# EAGLE board 001 (EAGLE 8.7.1)
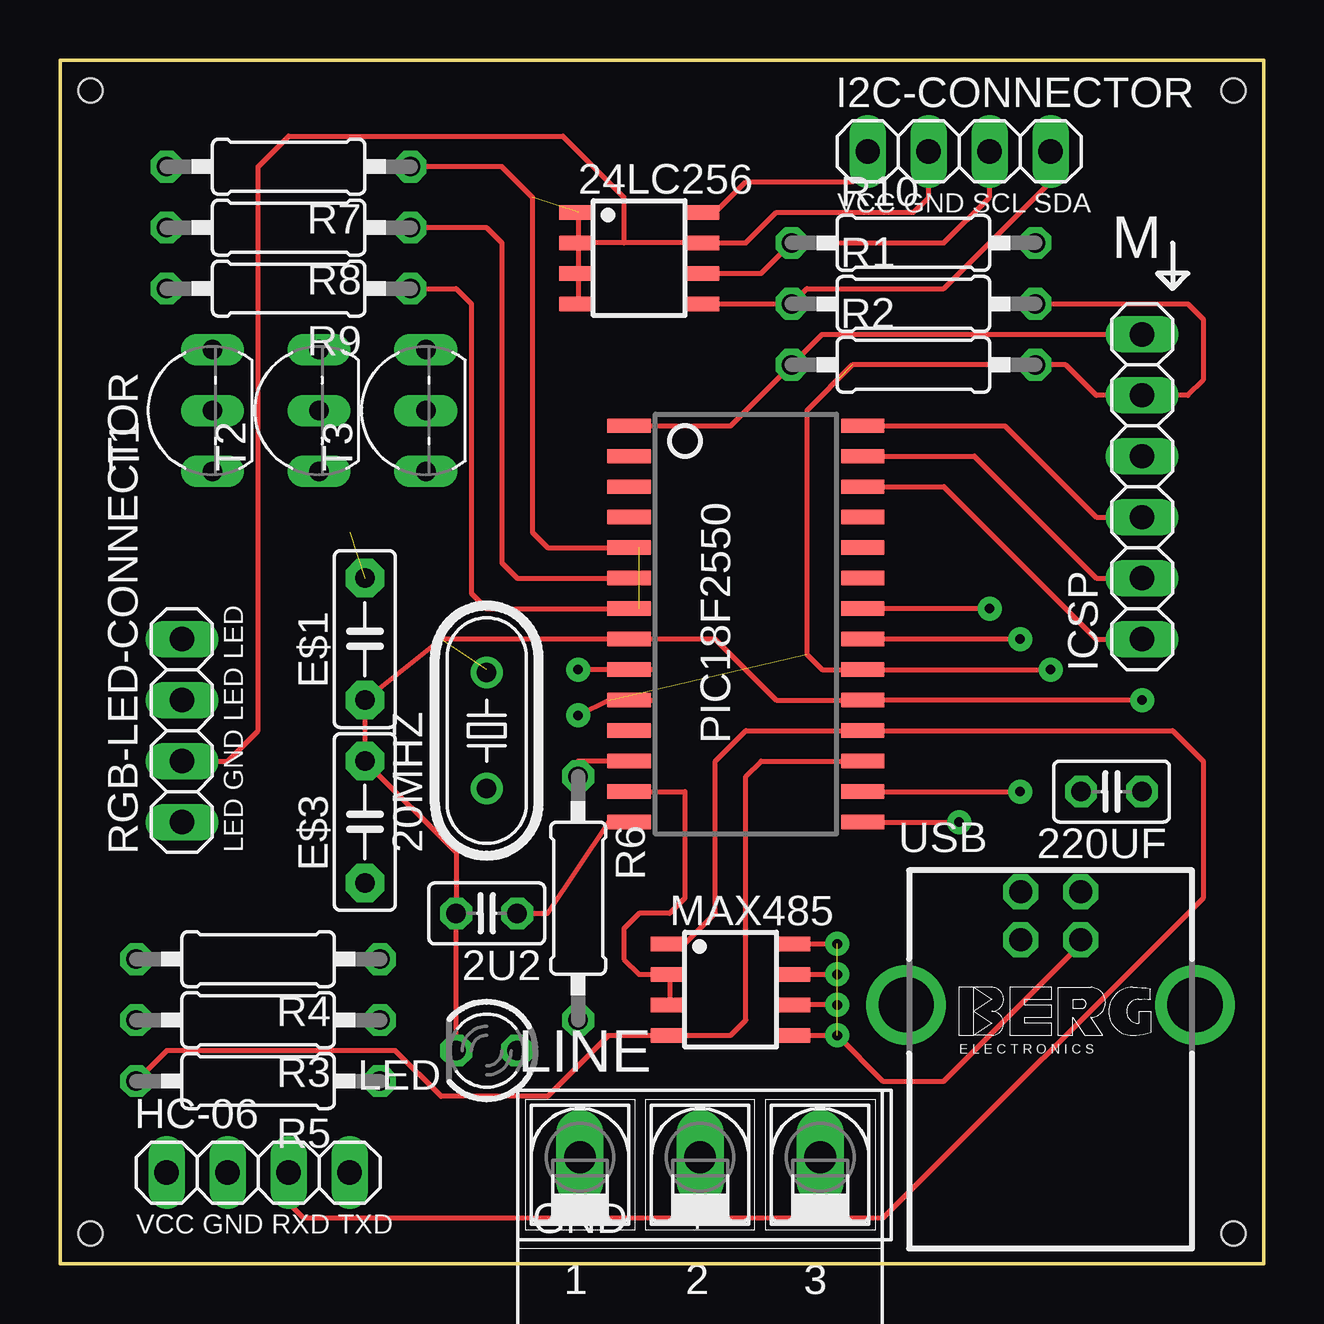
[diagram p0: board, top side]
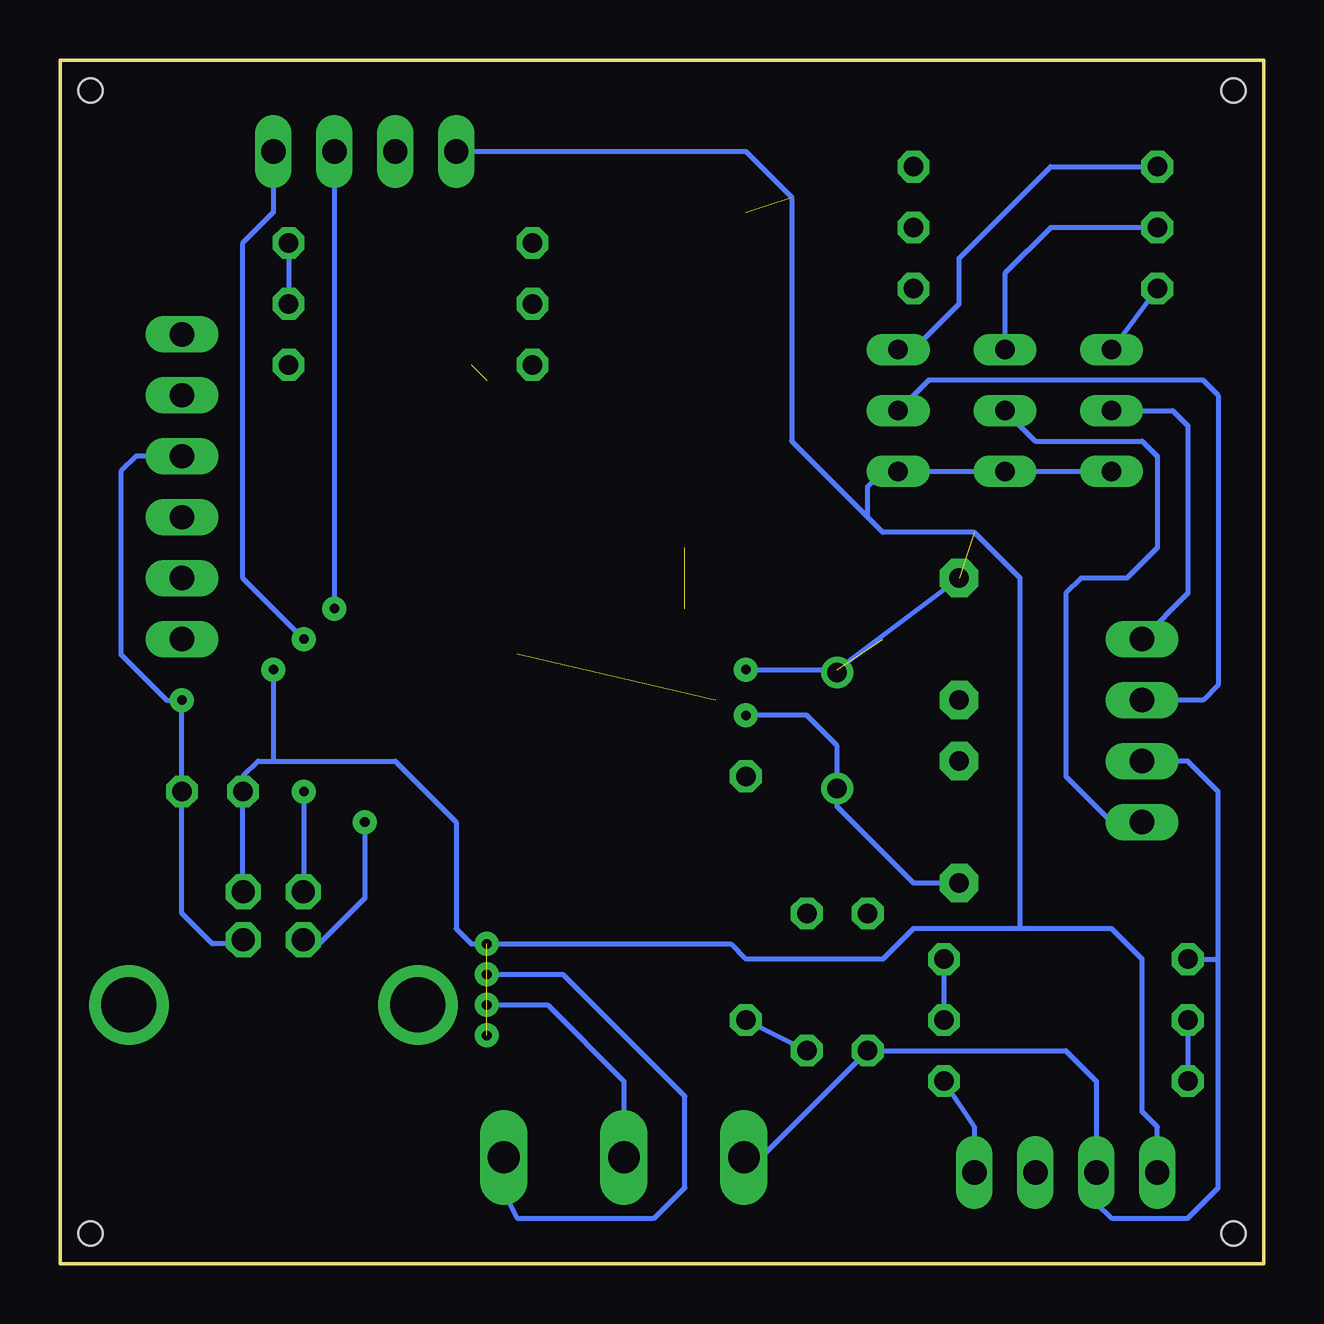
[diagram p1: board, bottom side, seen from below]

Size 50.16 x 50.16 mm. Coordinates in mm from the lower left corner, seen from the top.
Outline: 0,0 50.16,0 50.16,50.16 0,50.16 0,0
Copper layers (1*16): Top 0.035mm / dielectric 1.5mm / Bottom 0.035mm
Design rules "default": minimum track width 6mil, minimum drill 0.35mm, track to track 6mil, track to pad 6mil, pad to pad 6mil, via to via 6mil, smd to smd 6mil, copper to edge 40mil, drill to drill 6mil, minimum pad ring 10mil, minimum via ring 8mil, stop-mask expansion 4mil, vias tented up to drill 0mil, thermal gap 10mil
Holes 1 mm at 1.27,1.27 48.9,1.27 48.9,48.9 1.27,48.9

## Footprints (pad centres in the part's own frame; a part is rotated, then mirrored left to right if it is on the bottom)
C025-025X050 = drill 0.813 octagon: 1 -1.27,0; 2 1.27,0
HC49/S = drill 0.813: 1 -2.413,0; 2 2.413,0
M8 = smd 0.6 x 1.4: 1 -1.905,-2.63; 2 -0.635,-2.63; 3 0.635,-2.63; 4 1.905,-2.63; 5 1.905,2.63; 6 0.635,2.63; 7 -0.635,2.63; 8 -1.905,2.63
C5B2.5 = drill 0.813 pad 1.6 octagon: 1 -2.54,0; 2 2.54,0
1X04 = drill 1.016 long: 1 -3.81,0; 2 -1.27,0; 3 1.27,0; 4 3.81,0
1X06 = drill 1.016 long: 1 -6.35,0; 2 -3.81,0; 3 -1.27,0; 4 1.27,0; 5 3.81,0; 6 6.35,0
LED3MM = drill 0.813 octagon: A -1.27,0; K 1.27,0
AK500/3-H = drill 1.321 long: 1 -5.004,0; 2 0,0; 3 5.004,0
SOIC28-3 = smd 0.6 x 1.8: 1 -8.255,-4.87; 2 -6.985,-4.87; 3 -5.715,-4.87; 4 -4.445,-4.87; 5 -3.175,-4.87; 6 -1.905,-4.87; 7 -0.635,-4.87; 8 0.635,-4.87; 9 1.905,-4.87; 10 3.175,-4.87; 11 4.445,-4.87; 12 5.715,-4.87; 13 6.985,-4.87; 14 8.255,-4.87; 15 8.255,4.87; 16 6.985,4.87; 17 5.715,4.87; 18 4.445,4.87; 19 3.175,4.87; 20 1.905,4.87; 21 0.635,4.87; 22 -0.635,4.87; 23 -1.905,4.87; 24 -3.175,4.87; 25 -4.445,4.87; 26 -5.715,4.87; 27 -6.985,4.87; 28 -8.255,4.87
0207/10 = drill 0.813 octagon: 1 -5.08,0; 2 5.08,0
TO92-BCE = drill 0.813 long: B 2.54,0; C 0,0; E -2.54,0
PN61729-S = drill 0.95 octagon: 1 1.25,4.71; 2 -1.25,4.71; 3 -1.25,2.71; 4 1.25,2.71 | drill 2.3 pad 2.9: S1 -6.02,0; S2 6.02,0

## Placement (x,y rotation side)
2U2  [C025-025X050]  17.78,14.61 180 top
20MHZ  [HC49/S]  17.78,22.23 90 top
24LC256  [M8]  24.13,41.91 270 top
220UF  [C025-025X050]  43.81,19.68 180 top
E$1  [C5B2.5]  12.7,26.04 90 top
E$3  [C5B2.5]  12.7,18.41 90 top
HC-06  [1X04]  8.26,3.81 0 top
I2C-CONNECTOR  [1X04]  37.47,46.35 0 top
ICSP  [1X06]  45.09,32.38 90 top
LED  [LED3MM]  17.78,8.89 180 top
LINE  [AK500/3-H]  26.67,4.45 0 top  (not fitted)
MAX485  [M8]  27.94,11.43 270 top
PIC18F2550  [SOIC28-3]  28.57,26.67 270 top
R1  10k  [0207/10]  35.56,40.01 0 top
R2  10k  [0207/10]  35.56,37.47 0 top
R3  1k  [0207/10]  8.26,10.16 180 top
R4  1k  [0207/10]  8.26,12.7 180 top
R5  1k  [0207/10]  8.26,7.62 180 top
R6  470  [0207/10]  21.59,15.24 270 top
R7  470  [0207/10]  9.53,45.72 180 top
R8  470  [0207/10]  9.53,43.18 180 top
R9  470  [0207/10]  9.53,40.64 180 top
R10  10k  [0207/10]  35.56,42.55 0 top
RGB-LED-CONNECTOR  [1X04]  5.08,22.23 90 top
T1  BC640  [TO92-BCE]  6.35,35.56 90 top
T2  BC640  [TO92-BCE]  10.79,35.56 90 top
T3  BC640  [TO92-BCE]  15.24,35.56 90 top
USB  [PN61729-S]  41.27,10.79 0 top

## Library data of the parts
2U2 220UF = rcl
20MHZ = crystal
24LC256 MAX485 = memory
E$1 E$3 = capacitor-wima
HC-06 I2C-CONNECTOR ICSP RGB-LED-CONNECTOR = pinhead
LED = led
LINE = con-ptr500
PIC18F2550 = cypress
R1-R10 = eagle-ltspice
T1-T3 = transistor-pnp
USB = con-berg

## Nets
S$1: R3.2 R5.2
S$2: 2U2.2 HC-06.1 HC-06.2 I2C-CONNECTOR.1 LED.K R4.2 R7.1 R8.1 R9.1 RGB-LED-CONNECTOR.2
S$3: RGB-LED-CONNECTOR.4
S$5: I2C-CONNECTOR.4 R1.1
S$8: 2U2.1
S$11: HC-06.3
S$12: R7.2 T3.B
S$14: R6.1
S$15: R6.2
S$16: R1.2 R10.2
S$18: ICSP.2
S$20: I2C-CONNECTOR.3
S$23: R8.2 T2.B
S$24: I2C-CONNECTOR.2
S$25: HC-06.4 R5.1
S$27: R9.2 T1.B
S$28: T3.C
S$29: RGB-LED-CONNECTOR.1 T2.C
S$32: R3.1 R4.1

## Tracks (layer width: path | path; a pad name or v marks a point on that pad's centre or on a via)
S$1
  Top 0.2: 33.66,20.95 29.21,20.95 28.57,20.32 28.57,10.16 27.94,9.53 22.86,9.53 20.32,6.99 15.88,6.99 13.97,8.89 4.45,8.89 R5.2
  Bottom 0.2: R3.2 R5.2
S$2  (via drill 0.4 pad 1)  (8 unrouted)
  Top 0.2: R9.1 16.51,40.64 17.14,40.01 17.14,27.94 17.78,27.3 24.13,27.3 | 26.04,43.81 27.3,43.81 28.57,45.09 33.02,45.09 33.66,45.72 I2C-CONNECTOR.1 | 33.66,23.5 29.84,23.5 27.3,26.04 15.88,26.04 12.7,23.5 12.7,20.95 16.51,17.14 2U2.2 LED.K | 24.77,24.77 v21.59,24.77 | 24.13,28.57 19.05,28.57 18.41,29.21 18.41,42.55 17.78,43.18 R8.1 | 24.13,29.84 20.32,29.84 19.68,30.48 19.68,44.45 18.41,45.72 R7.1 | RGB-LED-CONNECTOR.2 6.99,20.95 8.26,22.23 8.26,45.72 9.53,46.99 20.95,46.99 23.5,44.45 23.5,42.55 | 21.59,43.81 21.59,42.55 | 21.59,42.55 21.59,40.01 | 26.67,42.55 23.5,42.55 | 23.5,42.55 21.59,42.55 | 39.37,10.16 36.83,7.62 34.29,7.62 v32.38,9.53 30.48,9.53 | v32.38,10.79 30.48,10.79 | 30.48,12.06 v32.38,12.06
  Bottom 0.2: I2C-CONNECTOR.1 21.59,46.35 19.68,44.45 19.68,34.29 16.51,31.11 | HC-06.1 4.45,5.71 5.08,6.35 5.08,12.7 6.35,13.97 10.16,13.97 | v21.59,24.77 17.78,24.77 12.7,28.57 | 21.59,4.45 20.95,4.45 LED.K 8.26,8.89 6.99,7.62 HC-06.2 6.99,2.54 6.35,1.91 3.17,1.91 1.91,3.17 1.91,12.7 | 1.91,12.7 1.91,19.68 3.17,20.95 RGB-LED-CONNECTOR.2 | 10.16,13.97 10.16,28.57 12.06,30.48 15.88,30.48 16.51,31.11 | 16.51,31.11 16.51,32.38 15.88,33.02 5.71,33.02 | R4.2 1.91,12.7 | 10.16,13.97 14.61,13.97 15.88,12.7 21.59,12.7 22.23,13.34 v32.38,13.34 | 26.67,4.45 26.67,7.62 29.84,10.79 v32.38,10.79 | 31.75,4.45 31.75,3.17 31.11,1.91 25.4,1.91 24.13,3.17 24.13,6.99 29.21,12.06 v32.38,12.06
S$3
  Bottom 0.2: 6.35,35.56 3.81,35.56 3.17,34.92 3.17,27.94 RGB-LED-CONNECTOR.4
S$5  (via drill 0.4 pad 1)
  Top 0.2: 27.3,40.01 R1.1 31.11,40.64 36.83,40.64 41.27,45.09 I2C-CONNECTOR.4 | v40.01,26.04 33.66,26.04
  Bottom 0.2: v40.01,26.04 42.55,28.57 42.55,42.55 41.27,43.81 I2C-CONNECTOR.4
S$6  (via drill 0.4 pad 1)
  Top 0.2: 33.66,19.68 v40.01,19.68
  Bottom 0.2: v40.01,19.68 40.01,15.24
S$7  (via drill 0.4 pad 1)
  Top 0.2: 33.66,18.41 v37.47,18.41
  Bottom 0.2: v37.47,18.41 37.47,15.24 39.37,13.34 40.01,13.34
S$8
  Top 0.2: 2U2.1 20.32,14.61 22.86,18.41 24.13,18.41
S$9
  Top 0.2: 38.73,9.53 42.55,13.34
S$10
  Top 0.2: 30.48,13.34 32.38,13.34
S$11
  Top 0.2: HC-06.3 9.53,2.54 10.16,1.91 34.29,1.91 47.62,15.24 47.62,20.95 46.35,22.23 28.57,22.23 27.3,20.95 27.3,14.61 26.04,13.34 25.4,13.34
S$12
  Bottom 0.2: T3.B 14.61,38.1 12.7,40.01 12.7,41.91 8.89,45.72 R7.2
S$13
  Top 0.2: 23.5,19.68 26.04,19.68 26.04,15.24 25.4,14.61 24.13,14.61 23.5,13.97 23.5,12.7 24.13,12.06 25.4,12.06 25.4,10.79 24.77,10.79
S$14
  Top 0.2: R6.1 21.59,20.95 23.5,20.95
S$15
  Bottom 0.2: R6.2 19.05,8.89
S$16  (via drill 0.4 pad 1)  (2 unrouted)
  Top 0.2: R1.2 46.99,40.01 47.62,39.37 47.62,36.83 46.99,36.2 43.18,36.2 41.91,37.47 33.02,37.47 31.11,35.56 31.11,25.4 31.75,24.77 v41.27,24.77 | v21.59,22.86 22.86,23.5 24.77,23.5
  Bottom 0.2: 12.7,15.88 14.61,15.88 17.78,19.05 17.78,21.59 19.05,22.86 v21.59,22.86 | 42.55,15.88 42.55,20.32 41.91,20.95 41.27,20.95 | 41.27,20.95 36.2,20.95 33.66,18.41 33.66,13.97 33.02,13.34 32.38,13.34 | v41.27,24.77 41.27,20.95 | R10.2 R1.2
S$17
  Top 0.2: 33.66,32.38 36.83,32.38 43.18,26.04 45.09,26.04
S$18
  Top 0.2: 33.66,33.66 38.1,33.66 43.18,28.57 ICSP.2
S$19
  Top 0.2: 33.66,34.92 39.37,34.92 43.18,31.11 45.09,31.11
S$20  (via drill 0.4 pad 1)
  Top 0.2: 27.3,41.27 29.21,41.27 30.48,42.55 36.83,42.55 38.73,44.45 I2C-CONNECTOR.3 | v38.73,27.3 33.66,27.3
  Bottom 0.2: I2C-CONNECTOR.3 v38.73,27.3
S$21
  Top 0.2: 23.5,34.92 27.94,34.92 31.75,38.73 45.09,38.73
S$22  (via drill 0.4 pad 1)
  Top 0.2: v45.09,23.5 33.02,23.5
  Bottom 0.2: 45.09,33.66 46.99,33.66 47.62,33.02 47.62,25.4 45.72,23.5 v45.09,23.5 45.09,14.61 43.81,13.34 42.55,13.34
S$23
  Bottom 0.2: R8.2 8.89,43.18 10.79,41.27 T2.B
S$24
  Top 0.2: 27.3,42.55 28.57,42.55 29.84,43.81 35.56,43.81 36.2,44.45 I2C-CONNECTOR.2
S$25
  Bottom 0.2: R5.1 12.06,5.71 HC-06.4
S$27
  Bottom 0.2: R9.2 T1.B
S$28
  Bottom 0.2: 5.08,23.5 2.54,23.5 1.91,24.13 1.91,36.2 2.54,36.83 13.97,36.83 T3.C
S$29
  Bottom 0.2: T2.C 9.53,34.29 5.08,34.29 4.45,33.66 4.45,29.84 5.71,28.57 7.62,28.57 8.26,27.94 8.26,20.32 6.35,18.41 RGB-LED-CONNECTOR.1
S$32
  Bottom 0.2: R4.1 R3.1

## Text on the board
tPlace: VCC GND SCL SDA | LED GND LED LED | VCC GND RXD TXD | GND | + | -
tNames: M